# Altium PCB Плата2.PcbDoc
Units mm, origin at the board's own origin, x right, y up, seen from the top; angles counter-clockwise.
Board outline 110 x 85 mm, 2 copper layers (Top Layer, Bottom Layer), stack 0.325 mm thick; 137 components, 79 nets, 413 pads, 86 vias.
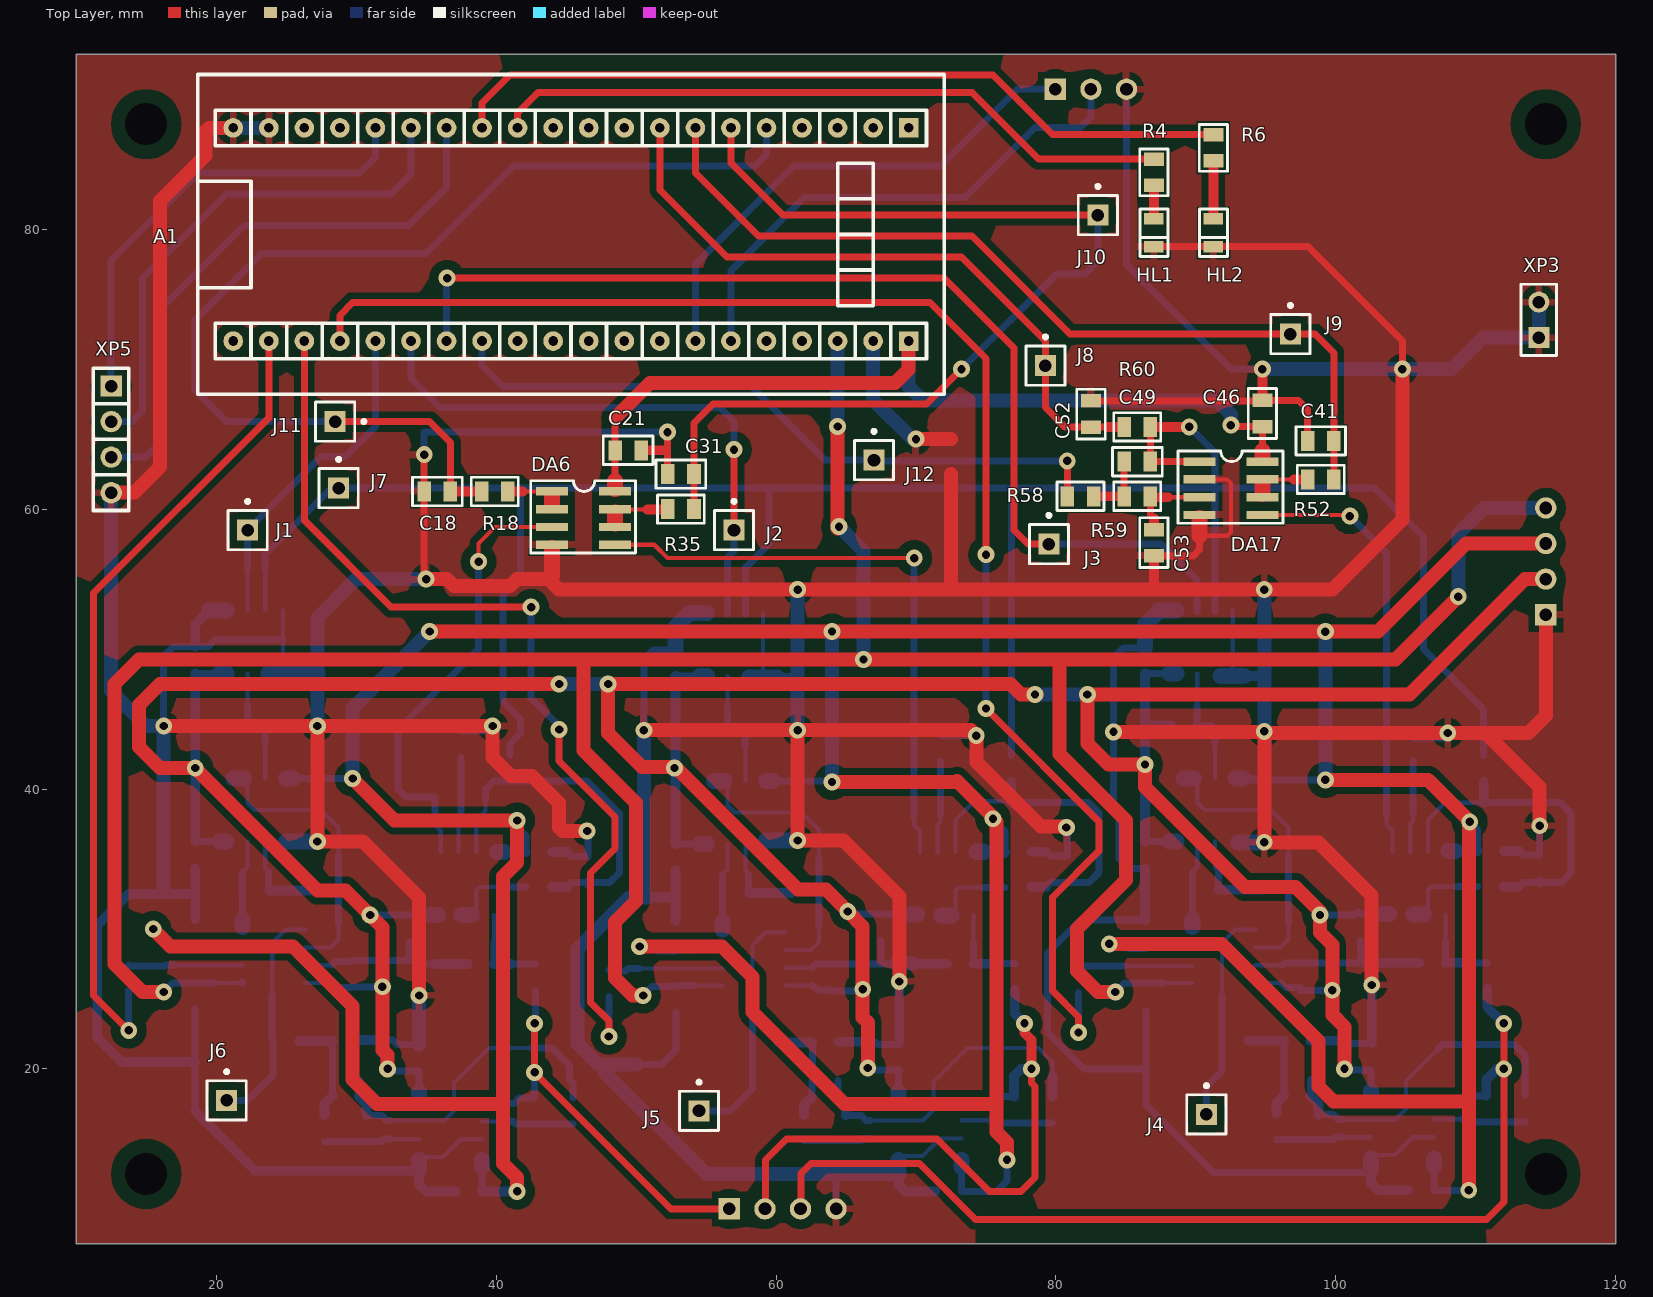
[diagram p0: Top Layer view]
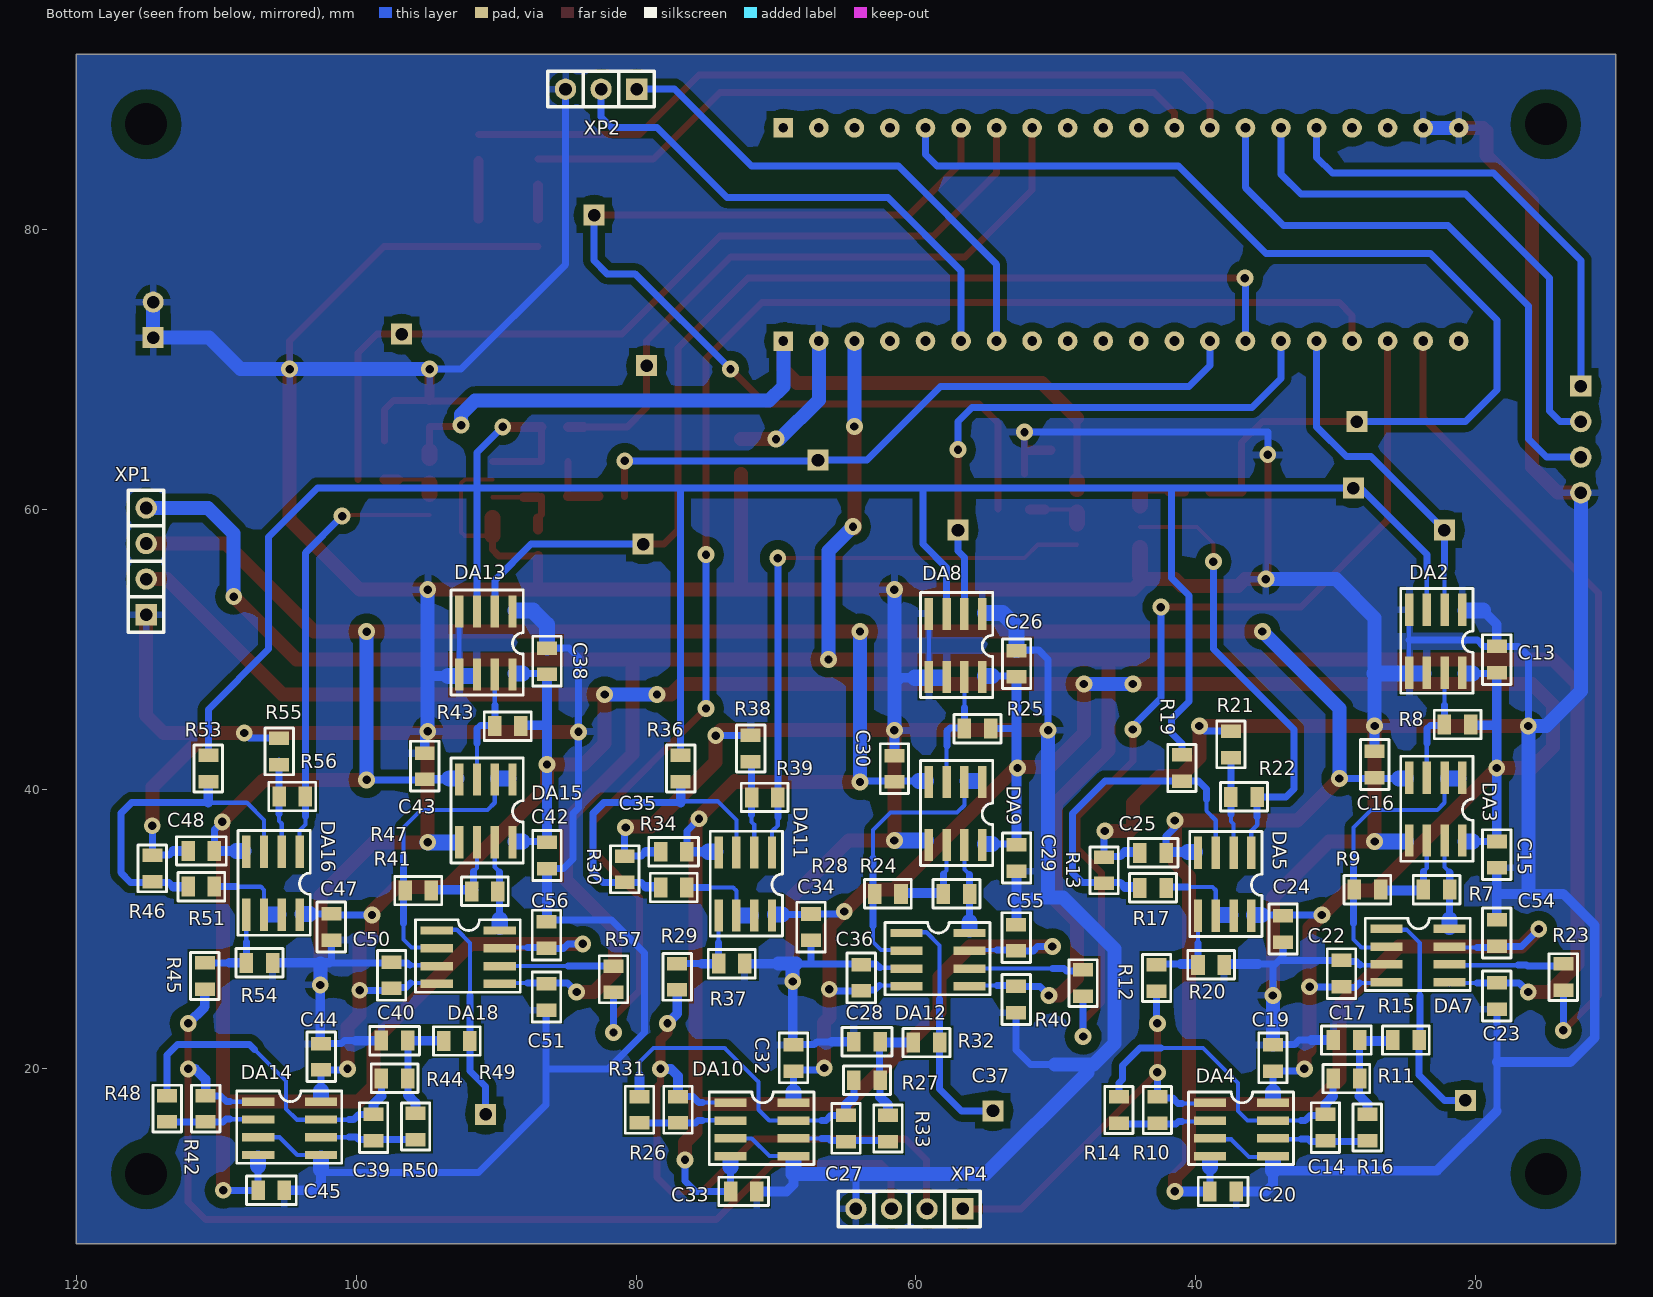
[diagram p1: Bottom Layer view, seen from below]
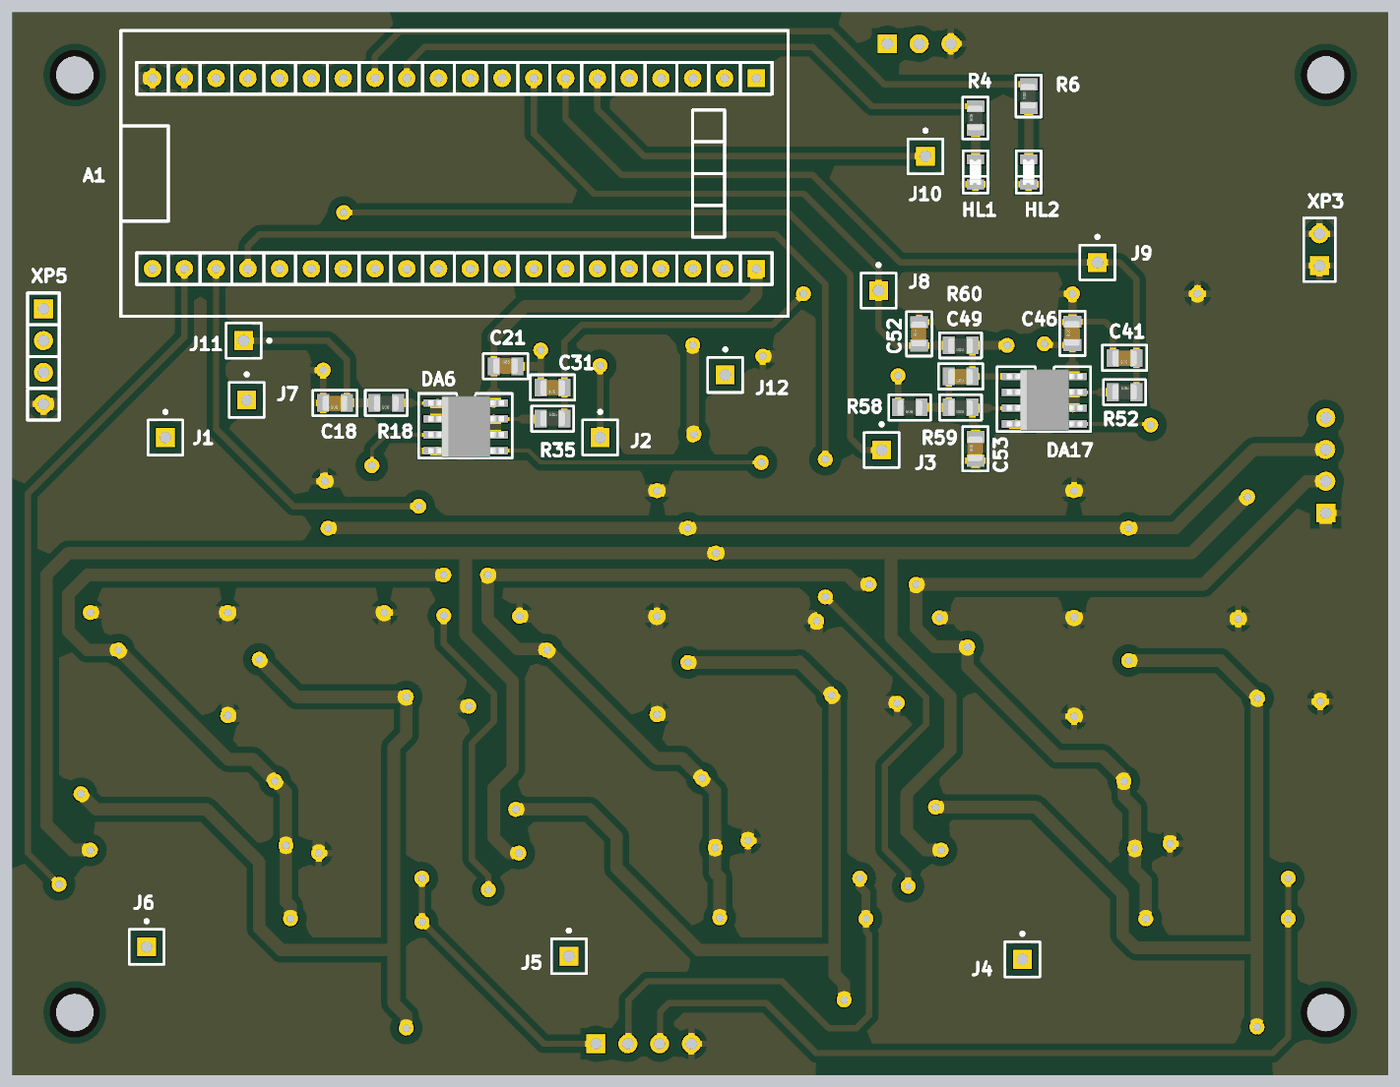
[diagram p2: 3D render of the assembled board from above, using the file's embedded part models]
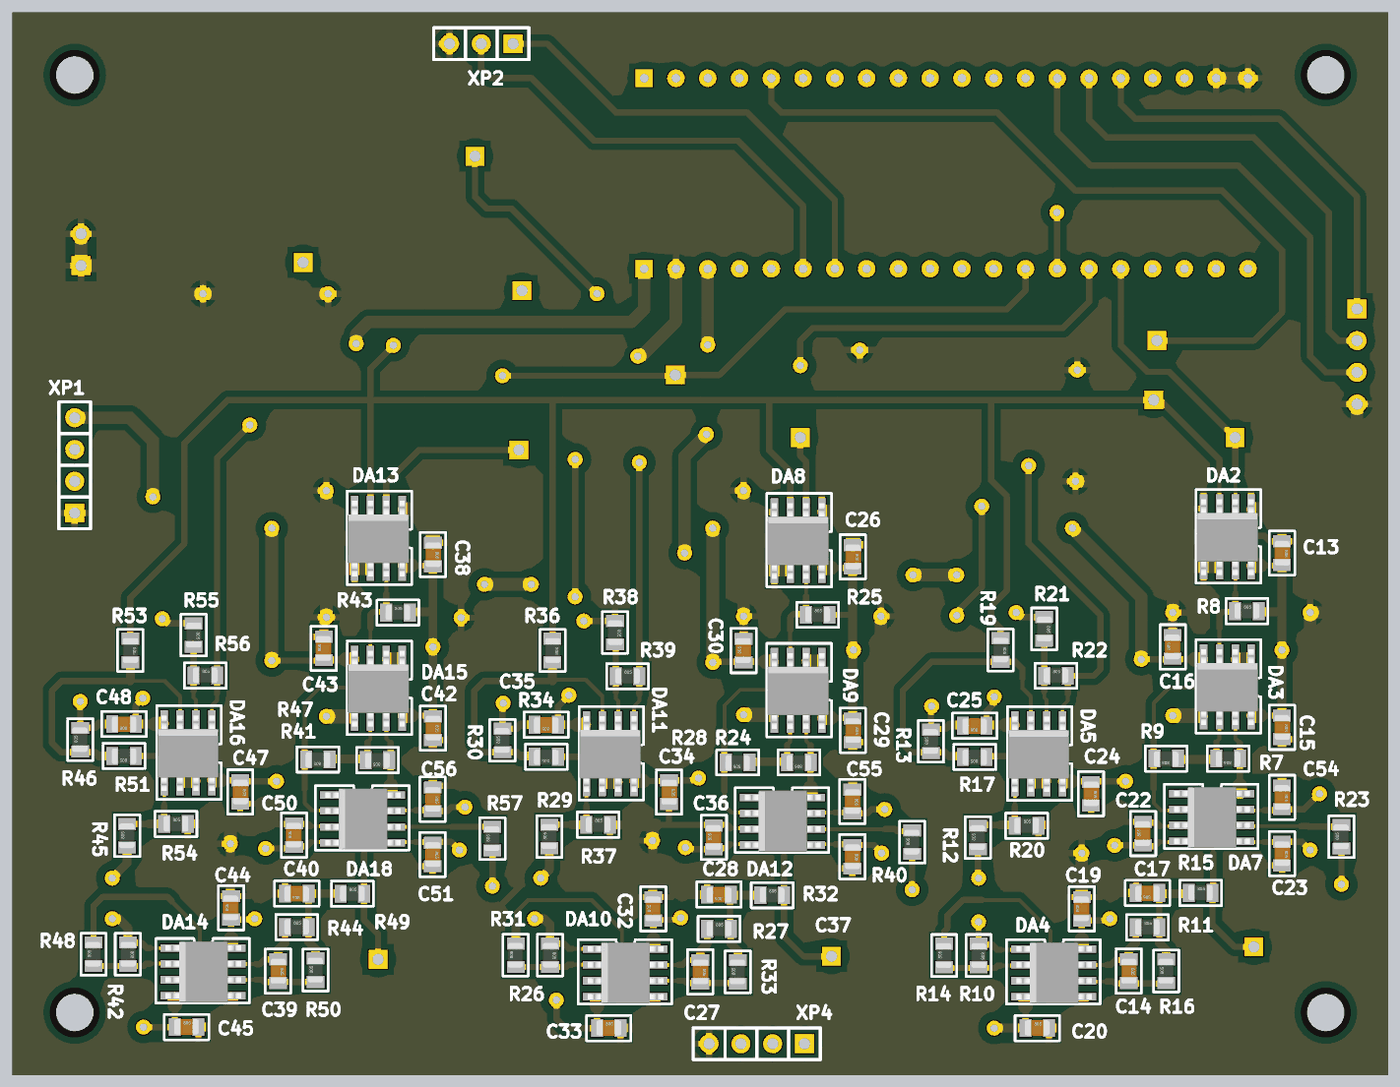
[diagram p3: 3D render of the assembled board from below, using the file's embedded part models]

## Layer stack, top to bottom
Top Solder 1: solder mask 0.0102, Solder Resist, Dk 3.5
Top Layer: signal copper 0.0356
Dielectric 1: core 0.254, FR-4, Dk 4.2
Bottom Layer: signal copper 0.0356
Bottom Solder 1: solder mask 0.0102, Solder Resist, Dk 3.5

## Board outline
10,7.5 10,92.5 120,92.5 120,7.5

## Design rules (kind name [scope] priority, off if disabled: settings)
Clearance [All] p1: gap=0.5 ignorepadtopadclearanceinfootprint=FALSE except(1: Fill-Hole Poly-Hole Region-Hole Text-Hole)
PlaneConnect [All] p1: planeconnectstyle=Relief reliefexpansion=0.508 reliefentries=4 reliefconductorwidth=0.254 reliefairgap=5
PolygonConnect [All] p1: connectstyle=Relief reliefconductorwidth=0.5 reliefentries=4 polygonreliefangle="90 Angle" airgapwidth=0.5
RoutingVias [All] p1: holewidth=0.6 width=1.2 viastyle="Through Hole" minholewidth=0.6 minwidth=1.2 maxholewidth=0.6 maxwidth=1.2
SilkToSolderMaskClearance [IsPad] p1: minsilkscreentomaskgap=0.195 clearancetoexposedcopper=TRUE
SolderMaskExpansion [All] p1: expansion=0.1
Width [All] p1: maxlimit=1.5 minlimit=0.3 preferedwidth=0.5
28 further rules are at their usual default settings.

## Components (designator, comment, footprint, x,y, rotation, side; value= is the part's Value field where it differs from the comment)
A1 "BluePill" BluePill 21.22,87.24 r270 top
C13 "0,1 мк" CA_0805 18.5,49.25 r90 bottom
C14 "68 нФ" CA_0805 30.75,15.81 r90 bottom
C15 "0,1 мк" CA_0805 18.5,35.31 r90 bottom
C16 "0,1 мк" CA_0805 27.23,41.75 r270 bottom
C17 "47 нФ" CA_0805 29.25,22.06 r180 bottom
C18 "47 пФ" CA_0805 35.8,61.26 r0 top
C19 "0,1 мк" CA_0805 34.5,20.79 r270 bottom
C20 "0,1 мк" CA_0805 38.06,11.25 r0 bottom
C21 "0,1 мк" CA_0805 49.44,64.2 r180 top
C22 "0,1 мк" CA_0805 29.6,26.81 r270 bottom
C23 "0,1 мк" CA_0805 18.5,25.21 r90 bottom
C24 "0,1 мк" CA_0805 33.77,30 r90 bottom
C25 "0,1 мк" CA_0805 43.06,35.44 r180 bottom
C26 "0,1 мк" CA_0805 52.81,48.949 r90 bottom
C27 "68 нФ" CA_0805 65,15.75 r90 bottom
C28 "47 нФ" CA_0805 63.5,21.94 r180 bottom
C29 "0,1 мк" CA_0805 52.81,35.069 r90 bottom
C30 "0,1 мк" CA_0805 61.54,41.449 r270 bottom
C31 "47 пФ" CA_0805 53.2,62.5 r0 top
C32 "0,1 мк" CA_0805 68.75,20.79 r270 bottom
C33 "0,1 мк" CA_0805 72.31,11.25 r0 bottom
C34 "0,1 мк" CA_0805 67.5,30.13 r90 bottom
C35 "0,1 мк" CA_0805 77.31,35.52 r180 bottom
C36 "0,1 мк" CA_0805 63.91,26.509 r270 bottom
C37 "0,1 мк" CA_0805 52.84,24.959 r90 bottom
C38 "0,1 мк" CA_0805 86.365,49.13 r90 bottom
C39 "68 нФ" CA_0805 98.75,15.81 r90 bottom
C40 "47 нФ" CA_0805 97.25,22.02 r180 bottom
C41 "47 пФ" CA_0805 98.92,64.87 r0 top
C42 "0,1 мк" CA_0805 86.365,35.25 r90 bottom
C43 "0,1 мк" CA_0805 95.095,41.63 r270 bottom
C44 "0,1 мк" CA_0805 102.5,20.87 r270 bottom
C45 "0,1 мк" CA_0805 106.06,11.33 r0 bottom
C46 "0,1 мк" CA_0805 94.75,66.83 r270 top
C47 "0,1 мк" CA_0805 101.77,30.14 r90 bottom
C48 "0,1 мк" CA_0805 111.06,35.58 r180 bottom
C49 "47 нФ" CA_0805 85.81,63.39 r0 top
C50 "0,1 мк" CA_0805 97.465,26.69 r270 bottom
C51 "0,1 мк" CA_0805 86.395,25.14 r90 bottom
C52 "47 пФ" CA_0805 82.5,66.79 r270 top
C53 "68 нФ" CA_0805 87,57.6 r270 top
C54 "0,1 мк" CA_0805 18.5,29.71 r90 bottom
C55 "0,1 мк" CA_0805 52.84,29.379 r90 bottom
C56 "0,1 мк" CA_0805 86.395,29.56 r90 bottom
DA2 "LM311" SC_SOIC8 20.96,52.81 r270 bottom
DA3 "OPA2134" SC_SOIC8 20.96,40.81 r270 bottom
DA4 "OPA2134" SC_SOIC8 39,17.58 r180 bottom
DA5 "OPA2134" SC_SOIC8 36.04,35.44 r270 bottom
DA6 "AD8602" SC_SOIC8 44,61.26 r0 top
DA7 "ADG419" SC_SOIC8 26.375,30.01 r180 bottom
DA8 "LM311" SC_SOIC8 55.27,52.509 r270 bottom
DA9 "OPA2134" SC_SOIC8 55.27,40.509 r270 bottom
DA10 "OPA2134" SC_SOIC8 73.25,17.58 r180 bottom
DA11 "OPA2134" SC_SOIC8 70.29,35.46 r270 bottom
DA12 "ADG419" SC_SOIC8 60.685,29.709 r180 bottom
DA13 "LM311" SC_SOIC8 88.825,52.69 r270 bottom
DA14 "OPA2134" SC_SOIC8 107,17.66 r180 bottom
DA15 "OPA2134" SC_SOIC8 88.825,40.69 r270 bottom
DA16 "OPA2134" SC_SOIC8 104.04,35.52 r270 bottom
DA17 "AD8602" SC_SOIC8 90.25,63.39 r0 top
DA18 "ADG419" SC_SOIC8 94.24,29.89 r180 bottom
HL1 "Свеодиод" DI_LED_0805 87,79.75 r270 top
HL2 "Свеодиод" DI_LED_0805 91.25,79.75 r270 top
J1 "Socket" PIN1 22.25,58.5 r0 top
J2 "Socket" PIN1 57,58.5 r0 top
J3 "Socket" PIN1 79.5,57.5 r0 top
J4 "Socket" PIN1 90.75,16.75 r0 top
J5 "Socket" PIN1 54.5,17 r0 top
J6 "Socket" PIN1 20.75,17.75 r0 top
J7 "Socket" PIN1 28.75,61.5 r0 top
J8 "Socket" PIN1 79.25,70.25 r0 top
J9 "Socket" PIN1 96.75,72.5 r0 top
J10 "Socket" PIN1 83,81 r0 top
J11 "Socket" PIN1 28.5,66.25 r270 top
J12 "Socket" PIN1 67,63.5 r0 top
R4 "330 Ом" RE_0805 87,84.06 r270 top
R6 "330 Ом" RE_0805 91.25,85.81 r270 top
R7 "10 к" RE_0805 22.8,32.81 r180 bottom
R8 "10 к" RE_0805 21.3,44.61 r0 bottom
R9 "10 к" RE_0805 27.75,32.81 r180 bottom
R10 "10 кОм" RE_0805 42.75,17.06 r90 bottom
R11 "2.2 кОм" RE_0805 29.25,19.31 r0 bottom
R12 "18 кОм" RE_0805 42.81,26.5 r270 bottom
R13 "10 кОм" RE_0805 46.56,34.19 r270 bottom
R14 "10 кОм" RE_0805 45.5,17.06 r270 bottom
R15 "2.2 кОм" RE_0805 25,22.06 r0 bottom
R16 "3.6 кОм" RE_0805 27.75,15.81 r270 bottom
R17 "10 кОм" RE_0805 43.06,32.94 r180 bottom
R18 "20 кОм" RE_0805 39.9,61.26 r0 top
R19 "10 кОм" RE_0805 41,41.5 r90 bottom
R20 "2.2 кОм" RE_0805 38.91,27.44 r0 bottom
R21 "10 кОм" RE_0805 37.5,43.19 r90 bottom
R22 "20 кОм" RE_0805 36.56,39.44 r0 bottom
R23 "4.7 к" RE_0805 13.75,26.56 r270 bottom
R24 "10 к" RE_0805 57.11,32.509 r180 bottom
R25 "10 к" RE_0805 55.61,44.309 r0 bottom
R26 "10 кОм" RE_0805 77,17.08 r90 bottom
R27 "2.2 кОм" RE_0805 63.5,19.19 r0 bottom
R28 "10 к" RE_0805 62.01,32.509 r180 bottom
R29 "18 кОм" RE_0805 77.06,26.58 r270 bottom
R30 "10 кОм" RE_0805 80.81,34.27 r270 bottom
R31 "10 кОм" RE_0805 79.75,17.08 r270 bottom
R32 "2.2 кОм" RE_0805 59.25,21.88 r0 bottom
R33 "3.6 кОм" RE_0805 62,15.75 r270 bottom
R34 "10 кОм" RE_0805 77.31,32.96 r180 bottom
R35 "20 кОм" RE_0805 53.2,60 r180 top
R36 "10 кОм" RE_0805 76.81,41.46 r90 bottom
R37 "2.2 кОм" RE_0805 73.16,27.52 r0 bottom
R38 "10 кОм" RE_0805 71.81,42.889 r90 bottom
R39 "20 кОм" RE_0805 70.81,39.4 r0 bottom
R40 "4.7 к" RE_0805 48.06,26.13 r270 bottom
R41 "10 к" RE_0805 90.805,32.69 r180 bottom
R42 "10 кОм" RE_0805 110.75,17.16 r90 bottom
R43 "10 к" RE_0805 89.165,44.49 r0 bottom
R44 "2.2 кОм" RE_0805 97.25,19.33 r0 bottom
R45 "18 кОм" RE_0805 110.81,26.64 r270 bottom
R46 "10 кОм" RE_0805 114.56,34.33 r270 bottom
R47 "10 к" RE_0805 95.565,32.74 r180 bottom
R48 "10 кОм" RE_0805 113.5,17.16 r270 bottom
R49 "2.2 кОм" RE_0805 92.805,22 r0 bottom
R50 "3.6 кОм" RE_0805 95.75,15.89 r270 bottom
R51 "10 кОм" RE_0805 111.06,33.02 r180 bottom
R52 "20 кОм" RE_0805 98.92,62.12 r180 top
R53 "10 кОм" RE_0805 110.56,41.46 r90 bottom
R54 "2.2 кОм" RE_0805 106.91,27.58 r0 bottom
R55 "10 кОм" RE_0805 105.5,42.69 r90 bottom
R56 "20 кОм" RE_0805 104.56,39.46 r0 bottom
R57 "4.7 к" RE_0805 81.615,26.41 r270 bottom
R58 "100 кОм" RE_0805 81.75,60.91 r0 top
R59 "8.2 кОм" RE_0805 85.81,60.91 r0 top
R60 "20 кОм" RE_0805 85.81,65.87 r0 top
XP1 "PLS-4" PLS4 115,52.46 r180 bottom
XP2 "PLS-3" PLS3 79.96,90 r90 bottom
XP3 "Header 2" HDR1X2 114.5,72.25 r90 top
XP4 "PLS-4" PLS4 56.67,10 r90 bottom
XP5 "PLS-4" PLS4 12.5,68.79 r180 top

## Footprints (in the part's own frame and the unit in brackets; to place one, negate y for a bottom-side part, rotate by r counter-clockwise, add the part's x,y. Pads: shape width x height; smd on the part's side, far side on the other; paste and mask are expansions set on the pad)
BluePill [mm]
  rect 1.4x1.4 hole 0.7: 1(0,48.26) 2(15.24,48.26)
  round 1.4 hole 0.7: 3(0,45.72) 4(15.24,45.72) 5(0,43.18) 6(15.24,43.18) 7(0,40.64) 8(15.24,40.64) 9(0,38.1) 10(15.24,38.1) 11(0,35.56) 12(15.24,35.56) 13(0,33.02) 14(15.24,33.02) 15(0,30.48) 16(15.24,30.48) 17(0,27.94) 18(15.24,27.94) 19(0,25.4) 20(15.24,25.4) 21(0,22.86) 22(15.24,22.86) 23(0,20.32) 24(15.24,20.32) 25(0,17.78) 26(15.24,17.78) 27(0,15.24) 28(15.24,15.24) 29(0,12.7) 30(15.24,12.7) 31(0,10.16) 32(15.24,10.16) 33(0,7.62) 34(15.24,7.62) 35(0,5.08) 36(15.24,5.08) 37(0,2.54) 38(15.24,2.54) 39(0,0) 40(15.24,0)
  silkscreen extent -3.81,-2.54 19.05,50.8
CA_0805 [mil] "CA_0805"
  rect 38x56 smd: 1(-37,0) 2(37,0)
  silkscreen extent -70,-40 70,40, body extent -39,-26 39,24, height 31
DI_LED_0805 [mm] "LD_0805_VAC"
  rect 0.8x1.4 smd: 1(-1,0) 2(1,0)
  silkscreen extent -1.7,-1 1.7,1, body extent -1.02,-0.47 1.05,0.43, height 0.85
HDR1X2 [mm] "Connector; Header; 2 Position"
  rect 1.5x1.5 hole 0.9: 1(0,0)
  round 1.5 hole 0.9: 2(2.54,0)
  silkscreen extent -1.27,-1.27 3.81,1.27
PIN1 [mm] "Connector; Plug"
  rect 1.5x1.5 hole 0.9: 1(0,0)
  silkscreen extent -1.4,-1.4 1.4,2.17
PLS3 [mil]
  rect 60x60 hole 35.43: 1(0,0)
  round 60 hole 35.43: 2(0,100) 3(0,200)
  silkscreen extent -50,-50 50,250
PLS4 [mil]
  rect 60x60 hole 35.43: 1(0,0)
  round 60 hole 35.43: 2(0,100) 3(0,200) 4(0,300)
  silkscreen extent -50,-50 50,350
RE_0805 [mil] "RE_0805"
  rect 38x56 smd: 1(-37,0) 2(37,0)
  silkscreen extent -66,-40 66,40, body extent -39,-26 39,24, height 31
SC_SOIC8 [mm] "8-Pin Small Outline Integrated Circuit 1.27 mm Pitch, IPC High Density"
  rect 2.3x0.6 smd: 1(0,0) 2(0,-1.27) 3(0,-2.54) 4(0,-3.81) 5(4.5,-3.81) 6(4.5,-2.54) 7(4.5,-1.27) 8(4.5,0)
  silkscreen extent -1.52,-4.41 5.97,0.76, body extent -0.74,-4.36 5.31,0.54, height 1.68

## Part data
C13 C14 C15 C16 C17 C18 C19 C20 C21 C22 C23 C24 C25 C26 C27 C28 C29 C30 C31 C32 C33 C34 C35 C36 C37 C38 C39 C40 C41 C42 C43 C44 C45 C46 C47 C48 C49 C50 C51 C52 C53 C54 C55 C56: library part Конденсатор
R4 R6 R7 R8 R9 R10 R11 R12 R13 R14 R15 R16 R17 R18 R19 R20 R21 R22 R23 R24 R25 R26 R27 R28 R29 R30 R31 R32 R33 R34 R35 R36 R37 R38 R39 R40 R41 R42 R43 R44 R45 R46 R47 R48 R49 R50 R51 R52 R53 R54 R55 R56 R57 R58 R59 R60: library part Резистор
XP3: "Header, 2-Pin", LatestRevisionDate=17-Jul-2002, LatestRevisionNote="Re-released for DXP Platform.", Publisher="Altium Limited"
J1 J2 J3 J4 J5 J6 J7 J8 J9 J10 J11 J12: LatestRevisionDate=17-Jul-2002, LatestRevisionNote="Re-released for DXP Platform.", Publisher="Altium Limited"

## Free pads (board coordinates)
  round 0 hole 3 unplated mask+2: 1(15,87.5) 2(15,12.5) 2(115,12.5) 2(115,87.5)

## Via types
v1: diameter 1.2, hole 0.6, Top Layer to Bottom Layer, 86 vias

## Nets (pads, with @x,y where several pads share a name; then routed paths per layer and width w, separated by ;. In a path a pad name is that pad's centre, name@x,y a point inside that pad or via, vN(x,y) a via of type N, cw(c..) or ccw(c..) an arc to the next point about the centre after c; other vN are vias at no path point)
1V65: C49.2 DA2.3 DA8.3 DA13.3 DA17.1 J7.1 R19.2 R36.2 R53.2 R60.2 | length 179.4
  Top Layer w0.5: R60.2 C49.2 DA17.1
  Top Layer w0.7: R60.2 v1(89.53,65.87)
  Bottom Layer w0.3: DA2.3 23.5,55.75
  Bottom Layer w0.5: 23.5,55.75 23.5,56.75 28.25,61.5 J7.1 41.75,61.5 ; R19.2 41,43.25 41.75,44 41.75,45 40.5,46.25 40.5,53.812 41.75,55.062 41.75,61.5 ; DA8.3 57.81,55.81 59.5,57.5 59.5,61.5 ; R36.2 76.81,61.5 ; v1(89.53,65.87) 91.365,64.035 91.365,61.5 ; DA13.3 91.365,61.5 ; R53.2 110.56,45.69 106.25,50 106.25,58 102.75,61.5 91.365,61.5 ; 41.75,61.5 59.5,61.5 ; 59.5,61.5 76.81,61.5 ; 76.81,61.5 91.365,61.5
3V3: A1.2 C21.2 C46.2 DA6.8 DA17.8 | length 61.9
  Top Layer w0.5: 48.5,61.99 C21.2 48.5,66.5 ; v1(92.5,66) 92.61,65.89 C46.2 94.75,64.14
  Top Layer w1: 48.5,66.5 51,69 68.5,69 69.48,69.98 A1.2
  Top Layer w1.15: DA6.8@48.5,61.45 48.5,61.99 ; DA17.8@94.75,63.64 94.75,64.14
  Bottom Layer w1: A1.2 69.48,68.77 70.5,67.75 91.5,67.75 92.5,66.75 v1(92.5,66)
+5: A1.6 C23.2 C37.2 C51.2 DA7.5 DA12.5 DA18.5 XP1.4 | length 232.5
  Top Layer w0.5: v1@16,25.5 16.25,25.25 v1(16.25,25.5)
  Top Layer w1: v1@16,25.5 14.75,25.5 12.75,27.5 12.75,47.5 14.5,49.25 46.25,49.25 ; v1(50.5,25.25) 49.75,25.25 48.5,26.5 48.5,30.5 50,32 50,39 46.25,42.75 46.25,49.25 ; v1@64.4,58.6 v1(64.4,65.9) ; v1(84.25,25.5) 83,25.5 81.5,27 81.5,30 85,33.5 85,37.75 81.5,41.25 80.25,42.5 80.25,49.25 ; v1(108.75,53.75) 104.25,49.25 80.25,49.25 ; 46.25,49.25 v1(66.25,49.25) 80.25,49.25
  Bottom Layer w0.3: 19.9,26.14 DA7.5@21.875,26.14 ; 54.21,25.959 DA12.5@56.185,25.959 ; 87.765,26.14 DA18.5@89.74,26.14
  Bottom Layer w0.5: v1(16.25,25.5) 16.9,26.15 C23.2 ; C23.2@18.53,26.14 19.9,26.14 ; DA7.5@21.875,26.14 DA7.5 ; v1(50.5,25.25) 51.15,25.9 C37.2@52.75,25.9 ; C37.2@52.84,25.959 54.21,25.959 ; v1(84.25,25.5) 84.9,26.15 C51.2@86.5,26.15 ; C51.2@86.395,26.14 87.765,26.14
  Bottom Layer w1: v1(64.4,65.9) A1.6 ; v1(64.5,58.75) 66.25,57 v1(66.25,49.25) ; v1(108.75,53.75) 108.75,58.25 110.58,60.08 XP1.4
+15: C13.1 C15.2 C19.2 C22.2 C24.2 C26.1 C29.2 C32.2 C34.2 C36.2 C38.1 C42.2 C44.2 C47.2 C50.2 DA2.8 DA3.8 DA4.8 DA5.8 DA7.4 DA8.8 DA9.8 DA10.8 DA11.8 DA12.4 DA13.8 DA14.8 DA15.8 DA16.8 DA18.4 R8.1 R25.1 R43.1 XP1.2 | length 315.7
  Top Layer w0.5: v1(98.865,31) v1@98.865,31.25
  Top Layer w1: v1(32.25,20) 32.25,21 31.88,21.37 v1(31.88,25.87) 31.88,30.12 v1(31,31) 29.25,32.75 27.25,32.75 v1(18.5,41.5) 16,41.5 14.5,43 14.5,46 16,47.5 v1(44.5,47.5) ; v1(66.56,20.069) 66.56,23.319 66.19,23.69 v1(66.19,25.69) 66.19,30.19 v1(65.13,31.25) 63.56,32.819 61.56,32.819 52.81,41.569 50.431,41.569 48,44 v1(48,47.5) 76.75,47.5 77.5,46.75 v1(78.5,46.75) ; v1(98.865,31) 98.865,29.75 99.745,28.87 v1(99.745,25.62) 99.745,23.87 100.615,23 v1(100.615,20) ; v1@98.865,31.25 97.115,33 93.5,33 86.365,40.135 v1(86.365,41.75) 83.75,41.75 82.25,43.25 v1(82.25,46.75) 105.25,46.75 113.5,55 XP1.2
  Bottom Layer w0.3: DA7.4@26.375,26.14 28.31,26.14 ; DA12.4@60.685,25.959 62.62,25.959 ; DA18.4@94.24,26.14 96.11,26.14
  Bottom Layer w0.5: C15.2@18.5,36.13 C15.2 20.25,36.25 ; C13.1@18.5,48.25 20.25,48.25 ; 28.31,26.14 28.64,25.81 C22.2@29.6,25.81 ; C22.2 v1(31.88,25.87) ; v1(31,31) 33.73,31 33.75,31.02 33.77,31 35.33,31 ; v1(32.25,20) 32.4,19.85 C19.2 34.5,18.35 ; C29.2 52.81,36.069 54.56,36.069 ; 52.81,44.25 52.869,44.309 R25.1 ; C26.1@52.81,48.069 54.56,48.069 ; 62.62,25.959 62.95,25.63 C36.2@63.91,25.63 ; C36.2 66.069,25.569 v1(66.19,25.69) ; v1(65.13,31.25) 65.31,31.069 C34.2 C34.2@68.04,31.069 ; v1@66.71,19.92 C32.2@68.81,19.92 ; C34.2@68.02,31.02 69.58,31.02 ; 68.75,18.35 C32.2 ; C42.2@86.365,36.25 88.115,36.25 ; C38.1@86.365,48.25 88.115,48.25 ; 96.11,26.14 96.44,25.81 C50.2@97.465,25.81 ; C50.2@97.465,25.62 v1(99.745,25.62) ; v1(98.865,31) 101.345,31 C47.2@101.595,31.25 ; v1(100.615,20) 100.684,19.931 C44.2 ; C47.2 103.33,31.08 ; 102.5,18.431 C44.2@102.5,19.75
  Bottom Layer w0.7: C15.2 v1(18.5,41.5) 18.5,44.55 ; C13.1@18.5,48.25 18.5,44.55 ; R8.1@20.36,44.55 18.5,44.55 ; C29.2@52.81,36.069 52.81,41.569 52.81,44.25 ; C26.1@52.81,48.069 C26.1 52.81,44.368 52.869,44.309 ; C42.2@86.365,36.25 v1(86.365,41.75) 86.365,44.55 ; C38.1@86.365,48.25 C38.1 86.365,44.55 ; R43.1@88.225,44.55 86.365,44.55
  Bottom Layer w1: v1(44.5,47.5) v1(48,47.5) ; v1(78.5,46.75) v1(82.25,46.75)
  Bottom Layer w1.15: 20.25,36.25 DA3.8@20.75,36.25 ; 20.25,48.25 DA2.8@20.75,48.25 ; DA4.8@34.5,17.85 34.5,18.35 ; 35.33,31 DA5.8@35.83,31 ; 54.56,36.069 DA9.8@55.06,36.069 ; 54.56,48.069 DA8.8@55.06,48.069 ; DA10.8@68.75,17.85 68.75,18.35 ; 69.58,31.02 DA11.8@70.08,31.02 ; 88.115,36.25 DA15.8@88.615,36.25 ; 88.115,48.25 DA13.8@88.615,48.25 ; DA14.8@102.5,17.931 102.5,18.431 ; 103.33,31.08 DA16.8@103.83,31.08
  other v1: 52.75,41.5
-15: C16.2 C20.2 C25.2 C30.2 C33.2 C35.2 C43.2 C45.2 C48.2 C54.1 C55.1 C56.1 DA3.4 DA4.4 DA5.4 DA7.7 DA9.4 DA10.4 DA11.4 DA12.7 DA14.4 DA15.4 DA16.4 DA18.7 XP1.3 | length 396.6
  Top Layer w0.5: 72.861,40.5 72.931,40.569
  Top Layer w1: v1(15.5,30) 16.75,28.75 25.5,28.75 29.75,24.5 29.75,19.25 31.5,17.5 40.5,17.5 ; v1(29.75,40.75) 32.75,37.75 v1(41.5,37.75) 41.5,34.75 40.5,33.75 40.5,17.5 ; v1(35.25,51.25) v1(64,51.25) v1(99.25,51.25) 103,51.25 103.75,52 109.29,57.54 XP1.3 ; v1(41.5,11.25) 41.5,12.25 40.5,13.25 40.5,17.5 ; v1(50.25,28.75) 56.13,28.75 58.317,26.562 58.317,24.062 60.063,22.317 64.88,17.5 75.75,17.5 ; v1(64,40.5) 72.861,40.5 ; 72.931,40.569 75.5,38 v1(75.5,37.88) 75.75,37.63 75.75,36.75 75.75,17.5 ; v1(76.5,13.5) 76.5,14.75 75.75,15.5 75.75,17.5 ; v1(83.805,28.931) 91.819,28.931 98.75,22 98.75,18.75 99.819,17.681 109.305,17.681 ; v1(99.25,40.65) 106.6,40.65 109.5,37.75 109.5,17.4 ; v1(109.5,11.33) 109.5,17.58
  Bottom Layer w0.3: 19.9,28.68 DA7.7@21.875,28.68 ; 54.21,28.499 DA12.7@56.185,28.499 ; 87.765,28.68 DA18.7@89.74,28.68
  Bottom Layer w0.5: v1(15.5,30) 16.75,28.75 18.48,28.75 C54.1 ; C54.1@18.5,28.71 18.53,28.68 19.9,28.68 ; 25.48,40.75 C16.2@27.23,40.75 ; C16.2 27.29,40.75 v1(29.75,40.75) ; C20.2 39,13 ; v1(41.5,37.75) 41.5,37.25 42.12,36.63 C25.2@42.12,35.5 ; v1(50.25,28.75) 51.31,28.75 51.621,28.439 C55.1 ; C55.1@52.84,28.499 54.21,28.499 ; 59.79,40.569 63.931,40.569 v1(64,40.5) ; 73.25,13 C33.2 75.75,11.25 76.5,12 v1(76.5,13.5) ; v1(75.5,37.88) 76.37,37.009 C35.2@76.37,35.319 ; v1(83.805,28.931) 84.865,28.931 85.176,28.62 C56.1 ; C56.1@86.395,28.68 87.765,28.68 ; 93.345,40.75 C43.2@95.095,40.75 ; 93.54,40.65 v1(99.25,40.65) ; 107,13.08 C45.2 v1(109.5,11.33) ; v1(109.56,37.65) 110.12,37.089 C48.2
  Bottom Layer w0.7: C20.2 v1(41.5,11.25) ; 40.56,35.5 C25.2@42.12,35.5 ; 74.81,35.52 C35.2 ; 108.56,35.58 C48.2
  Bottom Layer w1: v1(29.75,40.75) 29.75,45.75 v1(35.25,51.25) ; v1(64,40.5) v1(64,51.25) ; v1(99.25,40.65) v1(99.25,51.25)
  Bottom Layer w1.15: DA3.4@24.98,40.75 25.48,40.75 ; 39,13 DA4.4@39,13.5 ; DA5.4@40.06,35.5 40.56,35.5 ; DA9.4@59.29,40.569 59.79,40.569 ; 73.25,13 DA10.4@73.25,13.5 ; DA11.4@74.31,35.52 74.81,35.52 ; DA15.4@92.845,40.75 93.345,40.75 ; 107,13.08 DA14.4@107,13.58 ; DA16.4@108.06,35.58 108.56,35.58
ADC1: A1.9 C18.2 J11.1 R18.1 | length 78.1
  Top Layer w0.5: J11.1 35.25,66.25 36.74,64.76 C18.2
  Top Layer w0.7: C18.2 R18.1
  Bottom Layer w0.5: J11.1 20.75,66.25 18.5,68.5 18.5,73.5 23.25,78.25 35,78.25 41.25,84.5 58.5,84.5 59.32,85.32 A1.9
ADC2: A1.11 C31.2 J10.1 R35.1 | length 73.3
  Top Layer w0.5: R35.1 C31.2 54.14,66.14 55.5,67.5 70.75,67.5 v1(73.25,70) ; A1.11 56.78,84.72 60.5,81 J10.1
  Bottom Layer w0.5: v1(73.25,70) 80.063,76.813 82.063,76.813 83,77.75 J10.1
ADC3: A1.13 C41.2 J9.1 R52.1 | length 63.2
  Top Layer w0.5: A1.13 54.24,84.01 58.75,79.5 74,79.5 81,72.5 J9.1 98.5,72.5 99.86,71.14 C41.2 R52.1
ADC4: A1.15 C52.2 J8.1 R60.1 | length 47.4
  Top Layer w0.5: A1.15 51.7,82.8 56.5,78 73.25,78 79.25,72 J8.1 79.25,67.25 80.65,65.85 C52.2 82.52,65.87 83.75,65.87
  Top Layer w0.7: 83.75,65.87 R60.1
DTR: A1.27 XP5.3 | length 41.8
  Bottom Layer w0.5: XP5.3 14.96,63.71 16.25,65 16.25,74.5 22,80.25 33.75,80.25 36.46,82.96 A1.27
GND: A1.4 A1.37 A1.39 C13.2 C15.1 C16.1 C17.1 C18.1 C19.1 C20.1 C21.1 C22.1 C23.1 C24.1 C25.1 C26.2 C28.1 C29.1 C30.1 C31.1 C32.1 C33.1 C34.1 C35.1 C36.1 C37.1 C38.2 C40.1 C41.1 C42.1 C43.1 C44.1 C45.1 C46.1 C47.1 C48.1 C50.1 C51.1 C52.1 C53.2 C54.2 C55.2 C56.2 DA2.1 DA2.4 DA2.5 DA2.6 DA3.5 DA4.3 DA4.5 DA6.4 DA7.3 DA8.1 DA8.4 DA8.5 DA8.6 DA9.5 DA10.3 DA10.5 DA12.3 DA13.1 DA13.4 DA13.5 DA13.6 DA14.3 DA14.5 DA15.5 DA17.2 DA17.4 DA18.3 HL1.2 HL2.2 R13.1 R20.1 R21.2 R30.1 R37.1 R38.2 R46.1 R54.1 R55.2 XP1.1 XP2.3 XP3.1 XP3.2 XP4.4 XP5.4 | length 914.6
  Top Layer w0.3: 90.25,58.1 92.25,58.1 92.5,58.35 92.5,61.85 92.23,62.12 DA17.2
  Top Layer w0.5: 19.25,87 19.49,87.24 ; v1(34.86,63.89) C18.1 34.86,55.14 v1(35,55) ; 43.75,55 44,55.25 ; 44.5,37.25 44.75,37 ; 52.05,64.2 52.25,64 ; v1(52.25,65.5) 52.25,64 ; C31.1 52.25,62.51 52.25,64 ; C52.1 94.71,67.73 C46.1 97.33,67.77 97.98,67.12 C41.1 ; C53.2 89.81,56.66 90.25,57.1 90.25,58.1 ; HL1.2 HL2.2 98,78.75 104.75,72 v1(104.75,70) ; v1@94.885,44.069 v1@94.954,44 ; 110.643,44 110.69,44
  Top Layer w0.7: C21.1 52.05,64.2 ; 87,54.25 C53.2 ; C46.1 v1(94.75,70)
  Top Layer w1: XP5.4 14.17,61.17 16,63 16,82.02 19.25,85.27 19.25,87 ; v1(16.25,44.5) v1(27.23,44.5) ; 19.49,87.24 A1.39 ; v1(34.5,25.25) 34.5,32.25 30.5,36.25 v1(27.23,36.25) v1(27.23,44.5) ; v1(35,55) 36.5,55 37,54.5 41,54.5 41.5,55 43.75,55 44.5,54.25 v1(61.54,54.25) 72.5,54.25 ; 44.5,37.25 44.5,39 42.563,40.938 41.062,40.938 39.75,42.25 v1(39.75,44.5) v1(27.23,44.5) ; 44.75,37 v1(46.5,37) ; v1(50.56,44.199) v1(61.54,44.199) ; v1(68.81,26.25) 68.81,32.319 64.81,36.319 v1(61.54,36.319) v1(61.54,44.199) ; v1(70,65) 72.5,65 ; 72.5,62.5 72.5,54.25 ; v1@80.81,37.319 78.931,37.319 74.31,41.94 v1(74.31,43.819) 73.931,44.199 v1(61.54,44.199) ; v1(84.115,44.08) v1@94.885,44.08 ; v1(94.885,36.19) v1@94.885,44.069 ; v1@94.954,44 v1(108,44) 110.643,44 ; v1@95.48,36.19 98.75,36.19 102.56,32.38 v1(102.56,26) ; v1(104.75,70) 104.75,59.25 99.75,54.25 v1(94.885,54.25) 89.5,54.25 87,54.25 72.5,54.25 ; v1(114.56,37.38) 114.56,40.13 110.69,44 113.75,44 115,45.25 XP1.1
  Top Layer w1.15: 44,55.25 DA6.4@44,57.2 ; 90.25,58.1 DA17.4@90.25,59.35
  Bottom Layer w0.3: DA2.5@24.77,48.52 24.77,50.635 DA2.4@24.77,52.75 ; DA7.3@26.375,27.41 28.26,27.41 ; DA4.5@34.5,13.71 36.21,13.71 37.48,14.98 DA4.3@39,14.98 ; DA8.5@59.08,48.339 DA8.4 DA8.4@59.08,52.569 ; DA12.3@60.685,27.229 62.57,27.229 ; DA10.5 70.46,13.77 71.73,15.04 DA10.3 ; DA13.5@92.635,48.52 DA13.4 DA13.4@92.635,52.75 ; DA18.3@94.24,27.41 96.16,27.41 ; DA14.5 104.21,13.85 105.48,15.12 DA14.3
  Bottom Layer w0.5: 16,32.5 16.25,32.75 ; v1(16.25,44.5) 16.25,49.5 16.94,50.19 C13.2 19.44,50.19 19.885,50.635 24.77,50.635 ; 18.25,32.5 18.5,32.75 18.5,32.5 ; 18.5,17 18.5,20.5 C23.1 ; 27.23,47.73 27.23,48.25 ; 28.26,27.41 28.54,27.69 C22.1@29.6,27.69 ; C22.1 33.94,27.75 34,27.81 ; 31.75,22.06 32.64,22.06 32.97,21.73 C19.1 ; C24.1 33.77,28.04 34,27.81 ; DA4.5@34.5,13.71 DA4.5 ; v1(34.5,25.25) 34.5,27.31 34.31,27.5 ; v1(34.86,63.89) 34.86,65.5 v1(52.25,65.5) ; 35.56,27.5 34.31,27.5 ; R21.2 39.38,44.13 v1(39.75,44.5) ; 45.06,35.5 45.37,35.19 R13.1@46.56,35.19 ; v1(46.5,37) 46.56,36.94 R13.1@46.56,35.19 ; R13.1 R13.1@46.56,35.19 ; 50.069,20.319 51.819,20.319 52.84,21.34 C37.1 ; v1(50.56,44.199) 50.56,49.259 51.25,49.949 C26.2@52.81,49.949 ; 62.57,27.229 62.85,27.509 67.5,27.509 ; XP4.4 64.29,10.04 64.29,12.269 64.5,12.479 ; 66,21.94 67.08,21.94 67.29,21.73 C32.1 ; C34.1 67.5,27.509 ; 68.56,27.52 68.571,27.509 ; 68.81,27.27 68.571,27.509 ; v1@69.75,65 v1(70,65) ; R38.2 74.301,43.829 v1(74.31,43.819) ; 79.31,35.52 79.62,35.21 R30.1 v1@80.81,37.069 ; XP2.3 85.04,77.46 92.5,70 v1(94.75,70) ; C42.1 85.19,34.31 84.5,35 84.5,38.25 84.115,38.635 v1(84.115,44.08) 84.115,49.39 84.805,50.08 C38.2@86.365,50.08 ; 86.395,32.38 86.365,30.63 81.745,30.63 79.395,28.28 79.395,22.605 82,20 86.425,20 ; C51.1@86.425,24.15 86.425,20 ; v1@94.885,44.069 v1@95.095,43.859 ; 96.16,27.41 96.319,27.569 101.931,27.569 101.77,27.73 C47.1@101.77,29.14 ; 100,22.02 100.83,22.02 101.04,21.81 C44.1 ; 102.425,12.61 91.255,12.61 86.425,17.44 86.425,20 ; 102.56,27.525 102.615,27.58 ; R55.2@105.56,43.639 107.639,43.639 v1(108,44) ; 113.06,35.58 113.37,35.27 R46.1 v1@114.56,37.13 ; 34,27.81 34.31,27.5 ; 67.5,27.509 68.571,27.509
  Bottom Layer w0.7: 18.25,32.5 16,32.5 13.75,32.5 11.5,30.25 11.5,22.25 13.25,20.5 18.5,20.5 ; 18.5,17 22.77,12.73 34.5,12.73 ; C54.2@18.5,30.69 18.5,32.5 C15.1@18.5,34.31 ; C13.2 18.5,51.75 19.5,52.75 ; C16.1 v1(27.23,44.5) ; C17.1 31.75,22.06 ; 34.5,12.25 34.5,11.75 35,11.25 C20.1 ; 35.56,27.5 R20.1@37.971,27.5 ; C25.1@44,35.5 45.06,35.5 ; 50.809,32.249 52.81,32.249 ; C55.2@52.81,30.569 52.81,32.249 ; C29.1@52.81,34.19 C29.1 52.81,32.249 ; 60.07,47.949 61.06,47.949 61.54,47.469 ; C30.1 v1@61.54,43.949 ; C28.1 66,21.94 ; 68.75,12.25 68.75,11.75 69.25,11.25 C33.1 ; C32.1@68.81,21.799 v1(68.81,26.25) ; 69.81,27.52 R37.1 ; C35.1 79.31,35.52 ; C56.2@86.365,30.63 C42.1 ; 93.415,48.069 94.885,48.069 ; v1@94.885,44.069 v1(94.885,44.115) ; C43.1 v1@95.095,43.859 ; C40.1 100,22.02 ; 101.931,27.58 102.615,27.58 103.56,27.58 R54.1 ; 102.5,12.33 102.5,11.83 103,11.33 C45.1 ; C44.1@102.56,21.86 v1(102.56,26) ; C48.1 113.06,35.58
  Bottom Layer w1: XP5.4 12.5,47 15,44.5 v1(16.25,44.5) 16.25,32.75 ; A1.39 A1.37 ; v1(27.23,44.5) 27.23,47.73 ; 27.23,48.25 27.23,52.23 30,55 v1(35,55) ; C19.1 v1(34.5,25.25) ; 48,20.319 50.069,20.319 ; v1(50.56,44.199) 50.56,32.249 ; 50.809,32.249 50.56,32.249 ; v1(61.54,44.199) 61.54,47.469 v1(61.54,54.25) ; XP4.4@64.29,10.04 XP4.4@64.33,10 ; A1.4 66.94,67.81 v1@69.75,65 ; 68.56,27.52 69.81,27.52 ; v1(68.81,26.25) 68.81,27.27 ; 68.84,12.479 64.5,12.479 55.021,12.479 47.75,19.75 47.75,20.319 47.31,20.319 45.81,21.819 45.81,28.569 49.49,32.249 50.56,32.249 ; v1(94.75,70) v1(104.75,70) 108.25,70 110.5,72.25 XP3.1 XP3.2 ; v1(94.885,44.115) 94.885,48.069 v1(94.885,54.25) ; v1(102.56,26) 102.56,27.525
  Bottom Layer w1.15: 19.5,52.75 DA2.1@20.75,52.75 ; DA2.6@23.75,48.25 27.23,48.25 ; DA3.5@24.98,36.25 v1(27.23,36.25) ; 34.5,12.73 DA4.5@34.5,13.5 ; C26.2@52.81,49.949 52.81,51.569 53.81,52.569 DA8.1@55.06,52.569 ; DA8.6@58.06,47.949 60.07,47.949 ; DA9.5@59.29,36.319 v1(61.54,36.319) ; 68.75,12.73 DA10.5@68.75,13.5 ; C38.2@86.365,50.13 86.365,51.75 87.365,52.75 DA13.1@88.615,52.75 ; 91.75,48.069 93.415,48.069 ; 93,36.19 v1(94.885,36.19) ; 102.5,12.81 DA14.5@102.5,13.58
  other v1: 80.75,37.25
LED1: A1.23 R4.1 | length 49.1
  Top Layer w0.5: A1.23 41.54,88.29 43,89.75 74,89.75 78.75,85 R4.1
LED2: A1.25 R6.1 | length 56.6
  Top Layer w0.5: A1.25 39,89 41,91 75.5,91 79.75,86.75 R6.1
NetC14_1: C14.1 DA4.6 R16.2 | length 6.8
  Bottom Layer w0.3: 32.5,14.98 DA4.6@34.5,14.98
  Bottom Layer w0.5: R16.2@27.75,14.81 31.81,14.81 31.98,14.98 32.5,14.98
NetC14_2: C14.2 DA4.7 R11.2 R14.1 | length 23.7
  Bottom Layer w0.3: 32.5,16.31 DA4.7 36.31,16.31 37,17 37,19 39.5,21.5 42.5,21.5
  Bottom Layer w0.5: 30.19,18.06 R11.2@30.19,19.25 ; C14.2@30.75,16.69 31.81,16.69 32.19,16.31 32.5,16.31 ; 42.5,21.5 44,21.5 45.25,20.25 45.25,19.232 45.5,18.982 R14.1 R14.1@45.5,17.94
  Bottom Layer w0.7: 30.19,18.06 30.75,17.5 C14.2 C14.2@30.75,16.69
NetC17_2: C17.2 R11.1 R15.2 R16.1 | length 7.9
  Bottom Layer w0.5: 28.31,18.06 R11.1 C17.2@28.31,22
  Bottom Layer w0.7: R15.2@25.94,22 C17.2@28.31,22 ; R16.1@27.75,16.69 R16.1 27.75,17.5 28.31,18.06
NetC27_1: C27.1 DA10.6 R33.2 | length 6.8
  Bottom Layer w0.3: 66.75,15.04 DA10.6
  Bottom Layer w0.5: R33.2@62,14.87 66.06,14.87 66.23,15.04 66.75,15.04
NetC27_2: C27.2 DA10.7 R27.2 R31.1 | length 23.9
  Bottom Layer w0.3: 66.75,16.31 DA10.7 70.48,16.31 71.25,17.08 71.25,19.08 73.67,21.5 78.75,21.5 79.75,20.5 79.75,19.5
  Bottom Layer w0.5: 64.44,18 R27.2 ; C27.2 66.06,16.69 66.44,16.31 66.75,16.31
  Bottom Layer w0.7: 64.44,18 65,17.44 C27.2 ; R31.1 79.75,19.5
NetC28_2: C28.2 R27.1 R32.2 R33.1 | length 7.8
  Bottom Layer w0.5: 62.56,18 R27.1 ; R27.1@62.62,19.25 C28.2@62.62,21.94
  Bottom Layer w0.7: R32.2 C28.2@62.56,21.88 ; R33.1 62,17.44 62.56,18
NetC39_1: C39.1 DA14.6 R50.2 | length 6.8
  Bottom Layer w0.3: 100.5,15.12 DA14.6
  Bottom Layer w0.5: R50.2 99.81,14.951 99.98,15.12 100.5,15.12
NetC39_2: C39.2 DA14.7 R44.2 R48.1 | length 24.2
  Bottom Layer w0.3: 100.5,16.37 104.23,16.37 105,17.14 105,19.14 107.25,21.39
  Bottom Layer w0.5: 98.19,18.06 R44.2@98.19,19.25 ; C39.2 99.81,16.75 100.19,16.37 100.5,16.37 ; 107.25,21.39 107.61,21.75 112.75,21.75 113.5,21 R48.1@113.5,18.14
  Bottom Layer w0.7: 98.19,18.06 98.75,17.5 C39.2
NetC40_2: C40.2 R44.1 R49.2 R50.1 | length 8
  Bottom Layer w0.5: 96.31,18.14 R44.1 C40.2
  Bottom Layer w0.7: R49.2@93.745,22.02 C40.2 ; R50.1 95.75,17.58 96.31,18.14
NetC49_1: C49.1 R58.2 R59.1 | length 4.7
  Top Layer w0.5: R59.1 C49.1
  Top Layer w0.7: R58.2 R59.1
NetC53_1: C53.1 DA17.3 R59.2 | length 5.8
  Top Layer w0.3: 88,60.85 DA17.3
  Top Layer w0.5: R59.2@86.81,60.85 R59.2 86.75,59.6 87,59.35
  Top Layer w0.7: C53.1 87,59.35 ; R59.2@87.02,60.85 88,60.85
NetDA2_7: DA2.7 DA3.3 R8.2 | length 8.7
  Bottom Layer w0.3: 22.23,46 DA2.7@22.23,48.25 ; DA3.3@23.5,40.75 DA3.3 23.5,43.25
  Bottom Layer w0.5: R8.2@22.229,44.505 22.229,45.999 ; R8.2@22.24,44.55 23.25,44.55 23.49,44.31 23.49,43.26 23.5,43.25
NetDA3_1: DA3.1 DA3.2 DA7.2 R9.1 | length 20.3
  Bottom Layer w0.3: DA3.2@22.23,40.75 22.23,39.02 22.75,38.5 27.5,38.5 28.75,37.25 28.75,35.25 ; DA7.2@26.375,28.68 28.18,28.68 28.75,29.25 28.75,30.4
  Bottom Layer w0.5: 28.75,30.4 28.75,35.25
  Bottom Layer w1.15: DA3.1@21.25,40.75 DA3.2@22,40.75
NetDA3_6: DA3.6 R7.1 R9.2 | length 6.6
  Bottom Layer w0.3: DA3.6@23.5,36.25 23.5,34.35 23.74,34.11
  Bottom Layer w0.5: 23.74,34.11 R7.1 23.74,32.8 R7.1@23.79,32.75
  Bottom Layer w0.7: R7.1@23.79,32.75 R9.2@26.81,32.75
NetDA3_7: DA3.7 DA7.8 R7.2 | length 7.5
  Bottom Layer w0.3: 21.875,34.065 22.23,34.42 DA3.7@22.23,36.25
  Bottom Layer w0.5: R7.2@21.86,32.75 R7.2 21.86,34.05 ; 21.875,30.66 21.875,34.065
  Bottom Layer w1.15: DA7.8@21.875,30.16 21.875,30.66
NetDA4_2: DA4.2 R10.1 R14.2 | length 6.6
  Bottom Layer w0.3: DA4.2@39,16.25 41,16.25
  Bottom Layer w0.5: 41,16.25 41.25,16.25 41.44,16.06 R14.2@45.5,16.06
NetDA5_1: DA5.1 DA6.3 R22.1 | length 32.6
  Top Layer w0.3: v1(38.75,56.25) 38.75,57.55 39.92,58.72 DA6.3
  Bottom Layer w0.3: 35.62,38 35.62,37.44 36.04,37.02 DA5.1@36.04,35.5
  Bottom Layer w0.5: 35.62,38 R22.1 33.56,39.44 33,40 33,44.25 38.75,50 v1(38.75,56.25)
NetDA5_2: DA5.2 R21.1 R22.2 | length 6.8
  Bottom Layer w0.3: DA5.2@37.31,35.5 37.31,37.5 37.5,37.69 37.5,38.19
  Bottom Layer w0.5: 37.5,38.19 R22.2 R21.1
NetDA5_3: DA5.3 R13.2 R17.1 R19.1 | length 25.1
  Bottom Layer w0.3: DA5.3@38.58,35.5 38.58,37.77 39.25,38.44 39.25,39.25
  Bottom Layer w0.5: 39.25,39.25 39.25,40 39.81,40.56 R19.1 46.5,40.56 48.81,38.25 48.81,34 48.12,33.31 46.56,33.31 45.37,33.31 45.06,33
  Bottom Layer w0.7: R17.1@44,33 45.06,33 ; R13.2 R13.2@46.56,33.31
NetDA5_5: DA5.5 R12.1 R20.2 | length 6.5
  Bottom Layer w0.3: 39.85,29 DA5.5 DA5.5@39.85,31
  Bottom Layer w0.5: R20.2@39.85,27.5 39.85,29 ; 41.06,27.5 R12.1@42.81,27.5
  Bottom Layer w0.7: R20.2@39.85,27.5 41.06,27.5
NetDA5_6: DA5.6 DA5.7 R17.2 | length 6.2
  Bottom Layer w0.3: DA5.6@38.58,31 38.58,32.77 38.81,33 40.56,33
  Bottom Layer w0.5: 40.56,33 R17.2@42.12,33
  Bottom Layer w1.15: DA5.7@37.54,31 DA5.6@38.29,31
NetDA6_1: DA6.1 DA6.2 R18.2 | length 3.9
  Top Layer w0.3: 41.9,61.26 DA6.1
  Top Layer w0.7: R18.2 41.9,61.26
  Top Layer w1.15: DA6.2@44,60.26 DA6.1@44,61.01
NetDA6_5: DA6.5 DA11.1 R39.1 | length 42.9
  Top Layer w0.3: DA6.5 51.3,57.45 52.25,56.5 v1@69.815,56.5
  Bottom Layer w0.3: 69.87,37.96 69.87,37.4 70.29,36.98 DA11.1
  Bottom Layer w0.5: 69.87,37.96 R39.1 v1(69.87,56.5)
NetDA6_6: DA6.6 DA6.7 R35.2 | length 4.3
  Top Layer w0.3: DA6.7@48.44,59.97 48.52,59.97 50.8,59.97
  Top Layer w0.5: DA6.7 48.52,59.97 DA6.7@48.58,59.91
  Top Layer w0.7: 50.8,59.97 R35.2@51.87,59.97
  Top Layer w1.15: DA6.6@48.5,58.99 DA6.7@48.5,59.74
NetDA7_6: DA7.6 R23.1 | length 8.2
  Bottom Layer w0.3: 17,27.41 DA7.6@21.875,27.41
  Bottom Layer w0.5: R23.1@13.75,27.41 13.795,27.365 16.324,27.365 16.369,27.41 17,27.41
NetDA8_7: DA8.7 DA9.3 R25.2 | length 8.6
  Bottom Layer w0.3: 56.54,45.819 DA8.7 DA8.7@56.54,48.069 ; DA9.3@57.81,40.569 57.81,43.069
  Bottom Layer w0.5: R25.2@56.54,44.325 56.54,45.819 ; R25.2@56.55,44.369 57.56,44.369 57.8,44.13 57.8,43.08
NetDA9_1: DA9.1 DA9.2 DA12.2 R28.1 | length 20.3
  Bottom Layer w0.3: DA9.2@56.54,40.569 DA9.2 56.54,38.839 57.06,38.319 61.81,38.319 63.06,37.069 63.06,35.069 ; DA12.2@60.685,28.499 62.49,28.499 63.06,29.069 63.06,30.219
  Bottom Layer w0.5: 63.06,30.219 63.06,35.069
  Bottom Layer w1.15: DA9.1@55.56,40.569 DA9.2@56.31,40.569
NetDA9_6: DA9.6 R24.1 R28.2 | length 6.6
  Bottom Layer w0.3: DA9.6@57.81,36.069 DA9.6 57.81,34.169 58.05,33.93
  Bottom Layer w0.5: R24.1@58.05,32.619 58.05,33.93
  Bottom Layer w0.7: R24.1@58.05,32.569 R28.2@61.07,32.569
NetDA9_7: DA9.7 DA12.8 R24.2 | length 6.3
  Bottom Layer w0.3: 56.17,33.87 56.185,33.884 56.54,34.239 DA9.7 DA9.7@56.54,36.069
  Bottom Layer w0.5: 56.185,30.479 56.185,33.884
  Bottom Layer w1.15: DA12.8@56.185,29.979 56.185,30.479
NetDA10_2: DA10.2 R26.1 R31.2 | length 6.6
  Bottom Layer w0.3: DA10.2@73.25,16.33 75.25,16.33
  Bottom Layer w0.5: 75.25,16.33 75.56,16.33 75.75,16.14 R26.1 R31.2
NetDA11_2: DA11.2 R38.1 R39.2 | length 6.6
  Bottom Layer w0.3: DA11.2 71.56,37.46 71.75,37.65 71.75,38.15
  Bottom Layer w0.5: 71.75,38.15 R39.2 R38.1@71.75,41.949
NetDA11_3: DA11.3 R30.2 R34.1 R36.1 | length 24.4
  Bottom Layer w0.3: DA11.3@72.83,35.52 72.83,37.79 74.17,39.13 76.701,39.13 76.81,39.02
  Bottom Layer w0.5: 76.81,39.02 82.31,39.02 83.06,38.27 83.06,34.02 82.37,33.33 R30.2 79.62,33.33 79.31,33.02
  Bottom Layer w0.7: 76.81,39.02 R36.1 ; R34.1@78.25,33.02 79.31,33.02
NetDA11_5: DA11.5 R29.1 R37.2 | length 6.4
  Bottom Layer w0.3: 74.1,29.02 DA11.5
  Bottom Layer w0.5: R37.2 74.1,29.02 ; 75.31,27.52 R29.1
  Bottom Layer w0.7: R37.2 75.31,27.52
NetDA11_6: DA11.6 DA11.7 R34.2 | length 6.2
  Bottom Layer w0.3: DA11.6 72.83,32.73 73.06,32.96 74.81,32.96
  Bottom Layer w0.5: 74.81,32.96 R34.2
  Bottom Layer w1.15: DA11.7@71.79,30.96 DA11.6@72.54,30.96
NetDA12_6: DA12.6 R40.1 | length 8.2
  Bottom Layer w0.3: 50.25,27.169 DA12.6
  Bottom Layer w0.5: R40.1 48.13,27 49.25,27 49.419,27.169 50.25,27.169
NetDA13_7: DA13.7 DA15.3 R43.2 | length 8.6
  Bottom Layer w0.3: 90.095,46 DA13.7 DA13.7@90.095,48.25 ; DA15.3@91.365,40.75 91.365,43.25
  Bottom Layer w0.5: R43.2@90.094,44.505 90.094,45.999 ; R43.2@90.105,44.55 91.115,44.55 91.355,44.31 91.355,43.26
NetDA14_2: DA14.2 R42.1 R48.2 | length 6.6
  Bottom Layer w0.3: DA14.2@107,16.41 109,16.41
  Bottom Layer w0.5: 109,16.41 109.31,16.41 109.5,16.221 R42.1 R48.2
NetDA15_1: DA15.1 DA15.2 DA18.2 R47.1 | length 20.3
  Bottom Layer w0.3: DA15.2@90.095,40.75 DA15.2 90.095,39.02 90.615,38.5 95.365,38.5 96.615,37.25 96.615,35.25 ; DA18.2@94.24,28.68 96.045,28.68 96.615,29.25 96.615,30.4
  Bottom Layer w0.5: 96.615,30.4 96.615,35.25
  Bottom Layer w1.15: DA15.1@89.115,40.75 DA15.2@89.865,40.75
NetDA15_6: DA15.6 R41.1 R47.2 | length 6.6
  Bottom Layer w0.3: DA15.6@91.365,36.25 DA15.6 91.365,34.35 91.605,34.11
  Bottom Layer w0.5: R41.1@91.605,32.8 91.605,34.11
  Bottom Layer w0.7: R41.1@91.605,32.8 R47.2@94.625,32.8
NetDA15_7: DA15.7 DA18.8 R41.2 | length 6.2
  Bottom Layer w0.3: 89.74,34.065 90.095,34.42 DA15.7 DA15.7@90.095,36.25
  Bottom Layer w0.5: 89.74,30.66 89.74,34.065
  Bottom Layer w1.15: DA18.8@89.74,30.16 89.74,30.66
NetDA16_1: DA16.1 DA17.5 R56.1 | length 31.9
  Top Layer w0.3: DA17.5 v1@101.12,59.58
  Top Layer w0.5: v1(101,59.5) 101.2,59.5 v1@101.12,59.58
  Bottom Layer w0.3: 103.62,38.02 103.62,37.46 104.04,37.04 DA16.1
  Bottom Layer w0.5: v1(101,59.5) 103.62,56.88 R56.1 103.62,38.02
NetDA16_2: DA16.2 R55.1 R56.2 | length 6.6
  Bottom Layer w0.3: DA16.2 105.31,37.52 105.5,37.71 105.5,38.21
  Bottom Layer w0.5: 105.5,38.21 R56.2 R55.1 R55.1@105.5,42.009
NetDA16_3: DA16.3 R46.2 R51.1 R53.1 | length 24.4
  Bottom Layer w0.3: DA16.3 106.58,37.79 107.81,39.02 110.56,39.02
  Bottom Layer w0.5: 110.56,39.02 116.06,39.02 116.81,38.27 116.81,34.02 116.12,33.33 114.56,33.33 113.37,33.33 113.06,33.02
  Bottom Layer w0.7: 110.56,39.02 R53.1 ; R51.1 113.06,33.02 ; R46.2@114.56,33.33 R46.2
NetDA16_5: DA16.5 R45.1 R54.2 | length 6.4
  Bottom Layer w0.3: 107.85,29.08 DA16.5
  Bottom Layer w0.5: R54.2 107.85,29.08 ; 109.06,27.58 R45.1
  Bottom Layer w0.7: R54.2 109.06,27.58
NetDA16_6: DA16.6 DA16.7 R51.2 | length 6.2
  Bottom Layer w0.3: DA16.6 106.58,32.79 106.81,33.02 108.56,33.02
  Bottom Layer w0.5: 108.56,33.02 R51.2
  Bottom Layer w1.15: DA16.7@105.54,31.02 DA16.6@106.29,31.02
NetDA17_6: DA17.6 DA17.7 R52.2 | length 4
  Top Layer w0.3: DA17.7 97,62.12
  Top Layer w0.7: 97,62.12 R52.2
  Top Layer w1.15: DA17.6@94.75,61.08 DA17.7@94.75,61.83
NetDA18_6: DA18.6 R57.1 | length 8.1
  Bottom Layer w0.3: 84.865,27.35 DA18.6
  Bottom Layer w0.5: R57.1 84.865,27.35
NetHL1_1: HL1.1 R4.2 | length 2.4
  Top Layer w0.7: HL1.1 R4.2
NetHL2_1: HL2.1 R6.2 | length 4.1
  Top Layer w0.7: HL2.1 R6.2
PWM1: DA7.1 J6.1 R15.1 | length 16.3
  Bottom Layer w0.3: 24,25.25 24,29 24.95,29.95 DA7.1@26.375,29.95
  Bottom Layer w0.5: J6.1 22.25,17.75 24.06,19.56 R15.1 24,22.12 24,25.25
PWM2: DA12.1 J5.1 R32.1 | length 17.4
  Bottom Layer w0.3: 58.31,25.069 58.31,28.819 59.26,29.769 DA12.1@60.685,29.769
  Bottom Layer w0.5: J5.1 56.75,17 58.31,18.56 R32.1 58.31,25.009
PWM3: DA18.1 J4.1 R49.1 | length 15.5
  Bottom Layer w0.3: 91.865,25.25 91.865,29 92.815,29.95 DA18.1@94.24,29.95
  Bottom Layer w0.5: J4.1 90.75,18.75 91.865,19.865 R49.1 91.865,25.25
PWM_CH1: A1.32 DA2.2 J1.1 | length 24
  Bottom Layer w0.3: DA2.2 22.23,55.75
  Bottom Layer w0.5: 22.23,55.75 22.23,58.48 J1.1 27.5,63.75 29.25,63.75 31.38,65.88 A1.32
PWM_CH2: A1.30 DA8.2 J2.1 | length 41
  Top Layer w0.5: J2.1 v1(57,64.25)
  Bottom Layer w0.5: A1.30 33.92,69.33 36,67.25 56,67.25 57,66.25 v1(57,64.25) ; DA8.2 56.54,56.54 57,57 J2.1
PWM_CH3: A1.28 DA13.2 J3.1 | length 76.9
  Top Layer w0.5: A1.28 A1.28@36.5,71.96 ; v1(36.5,76.5) 72,76.5 77,71.5 77,58.5 78,57.5 J3.1
  Bottom Layer w0.5: A1.28 36.46,76.46 v1(36.5,76.5) ; J3.1 87.5,57.5 90.095,54.905 DA13.2
PWM_CH4: A1.26 J12.1 R58.1 | length 48.9
  Top Layer w0.5: R58.1 v1(80.81,63.44)
  Bottom Layer w0.5: A1.26 39,70.25 40.5,68.75 58.25,68.75 63.5,63.5 J12.1 67.06,63.44 v1(80.81,63.44)
RX: A1.14 XP2.1 | length 36.4
  Bottom Layer w0.5: A1.14 54.24,77.49 61.25,84.5 71.75,84.5 77.25,90 XP2.1
RX_Term: A1.31 XP5.1 | length 33
  Bottom Layer w0.5: XP5.1 12.5,77.75 18.75,84 30.25,84 31.38,85.13 A1.31
SW1: A1.38 R23.2 | length 58.3
  Top Layer w0.5: v1(13.75,22.75) 11.25,25.25 11.25,54 23.76,66.51 A1.38
  Bottom Layer w0.5: v1(13.75,22.75) R23.2
SW2: A1.36 R40.2 | length 68.9
  Top Layer w0.5: A1.36 26.3,59.2 32.5,53 v1(42.5,53) ; v1(44.5,44.25) 44.5,42 48.5,38 48.5,35.75 46.75,34 46.75,24.75 48.06,23.44 v1(48.06,22.319)
  Bottom Layer w0.5: v1(42.5,53) 42.5,46.5 44.5,44.5 v1(44.5,44.25) ; v1(48.06,22.319) R40.2
SW3: A1.34 R57.2 | length 106.5
  Top Layer w0.5: A1.34 28.84,73.84 29.75,74.75 71,74.75 75,70.75 v1(75,56.75) ; v1(75,45.75) 83.06,37.69 83.06,35.56 79.75,32.25 79.75,25.585 81.615,23.72 v1(81.615,22.6)
  Bottom Layer w0.5: v1(75,45.75) v1(75,56.75) ; v1(81.615,22.6) R57.2
TX: A1.12 XP2.2 | length 37.3
  Bottom Layer w0.5: A1.12 56.78,77.03 62,82.25 73.5,82.25 78.5,87.25 81.75,87.25 82.5,88 XP2.2
TX_Term: A1.29 XP5.2 | length 37.6
  Bottom Layer w0.5: XP5.2 14,66.25 14.75,67 14.75,76.5 20.75,82.5 32.5,82.5 33.92,83.92 A1.29
Ua: DA4.1 R10.2 R12.2 XP4.1 | length 29.6
  Top Layer w0.5: v1(42.75,23.25) v1(42.75,19.75) 52.5,10 XP4.1 XP4.1@56.71,10
  Bottom Layer w0.3: DA4.1@39,17.52 41,17.52
  Bottom Layer w0.5: 41,17.52 41.27,17.52 41.69,17.94 42.75,17.94 R10.2 v1(42.75,19.75) ; v1(42.75,23.25) 42.81,23.31 R12.2
Ub: DA10.1 R26.2 R29.2 XP4.2 | length 46
  Top Layer w0.5: XP4.2@59.25,10 59.25,13.5 60.75,15 71.5,15 75.25,11.25 77.5,11.25 78.5,12.25 78.5,18.75 78.25,19 v1(78.25,20)
  Top Layer w0.7: v1(77.75,23.25) 77.75,22.58 78.25,22.08 v1(78.25,20)
  Bottom Layer w0.3: DA10.1@73.25,17.6 75.25,17.6
  Bottom Layer w0.5: 75.25,17.6 75.52,17.6 75.94,18.02 R26.2@76.77,18.02
  Bottom Layer w0.7: R26.2 77,19.5 77.5,20 v1(78.25,20) ; R29.2 77.06,23.94 v1(77.75,23.25)
Uc: DA14.1 R42.2 R45.2 XP4.3 | length 77.6
  Top Layer w0.5: XP4.3@61.79,10 61.79,12.54 62.5,13.25 70.25,13.25 74.25,9.25 110.75,9.25 112,10.5 v1(112,20) v1(112,23.25)
  Bottom Layer w0.3: DA14.1 109,17.66
  Bottom Layer w0.5: 109,17.66 109.27,17.66 109.69,18.08 R42.2@110.83,18.08 ; 110.81,24.44 110.81,24.5
  Bottom Layer w0.7: R42.2 110.75,19.25 111.5,20 v1(112,20) ; 110.81,24.44 v1(112,23.25) ; 110.81,24.5 R45.2
pads on no net: A1.1 A1.3 A1.5 A1.7 A1.8 A1.10 A1.16 A1.17 A1.18 A1.19 A1.20 A1.21 A1.22 A1.24 A1.33 A1.35 A1.40

## Polygon pours and split planes (outlines as drawn)
GND on Bottom Layer "GND" (solid, pour order 4): 10,7.5 10,92.5 120,92.5 120,7.5
GND on Top Layer "GND" (solid, pour order 6): 10,7.5 10,92.5 120,92.5 120,7.5

## Silkscreen, mask and mechanical layers (free items; w line width, h text height)
Mechanical 4:
  the board outline again, w0.254